# Altium PCB ZigBug.PcbDoc
Units mil, origin at the board's own origin, x right, y up, seen from the top; angles counter-clockwise.
Board outline 1800 x 2750 mil, 4 copper layers (Top Layer, GND, VCC, Bottom Layer), stack 30.634 mil thick; 66 components, 59 nets, 305 pads, 72 vias.
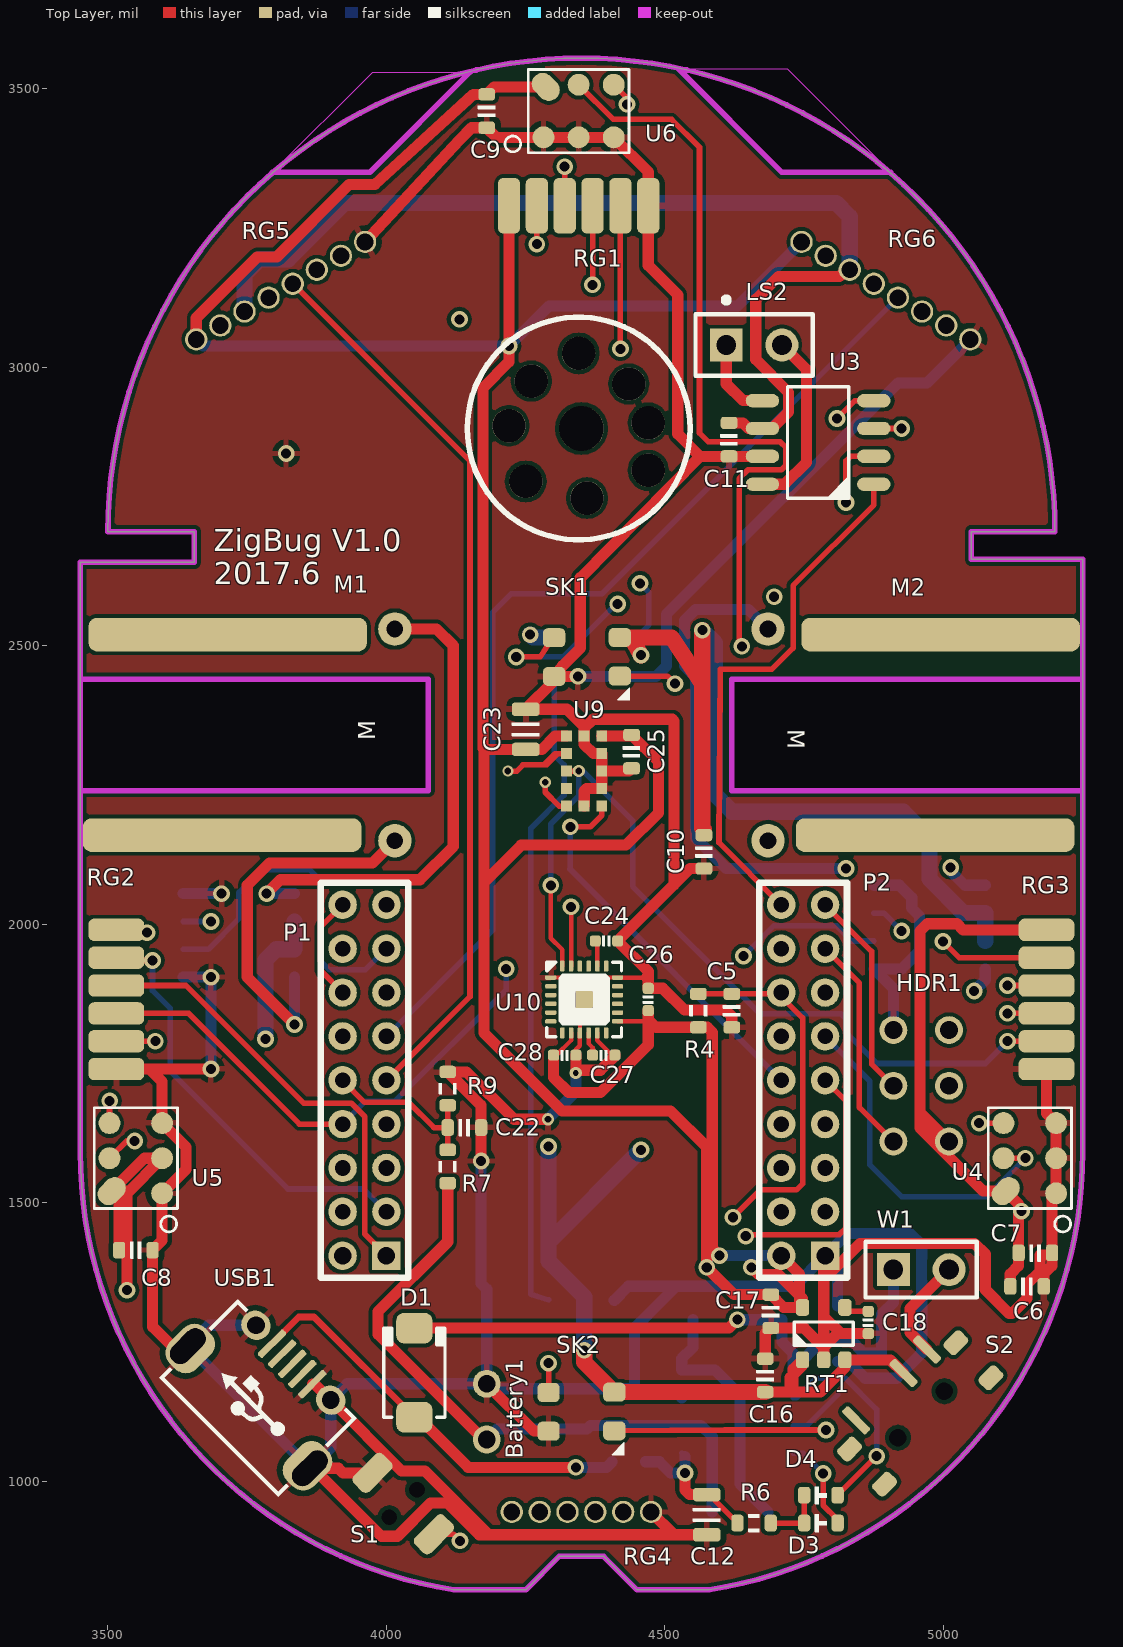
[diagram p0: Top Layer view]
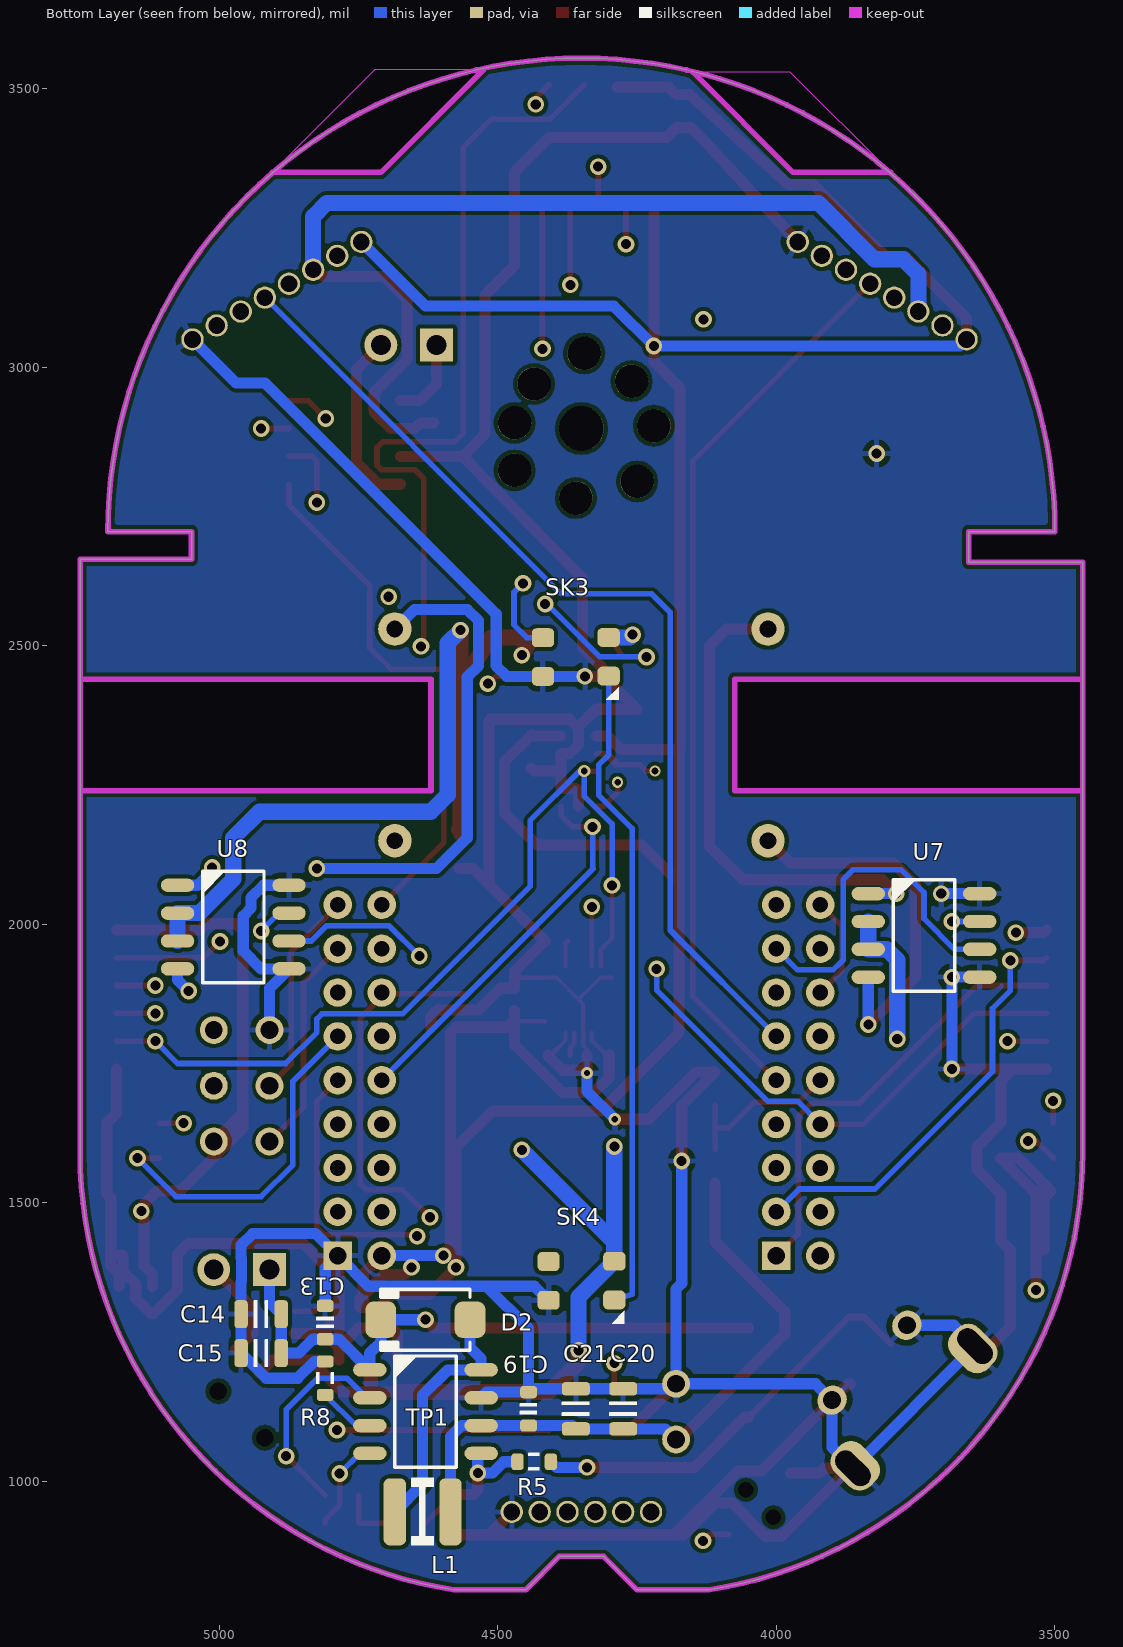
[diagram p1: Bottom Layer view, seen from below]
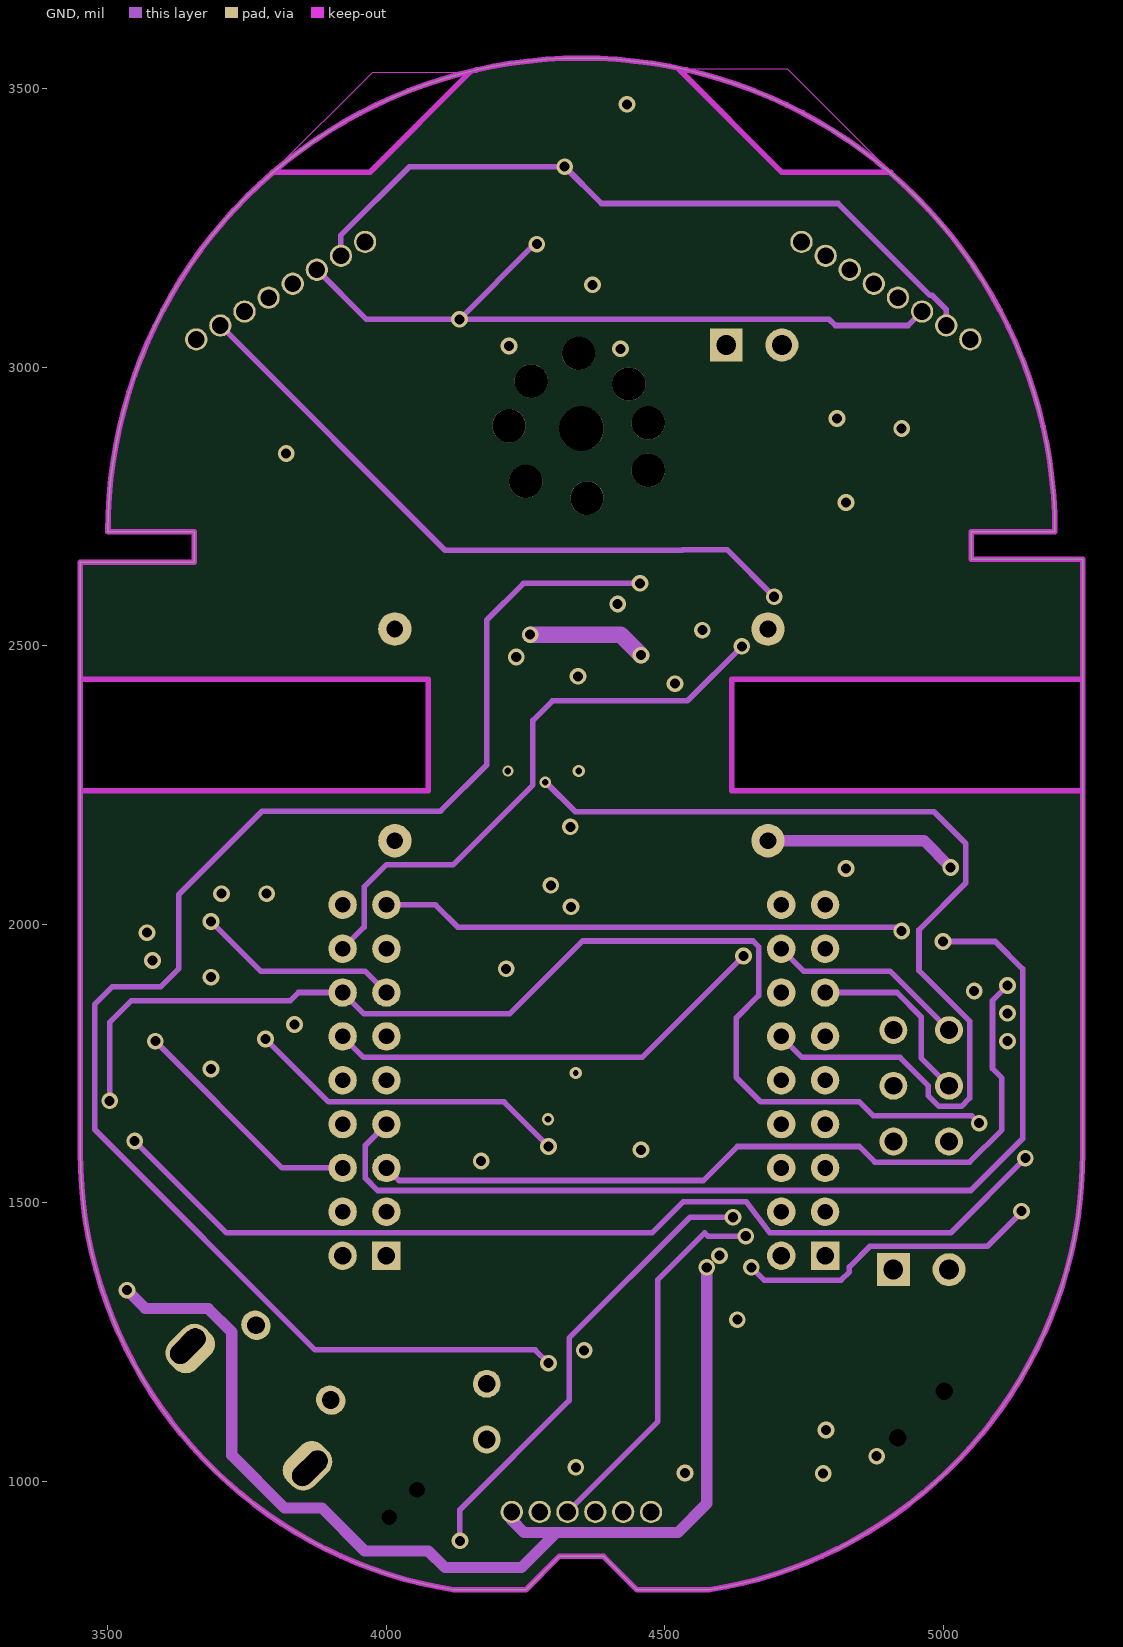
[diagram p2: GND]
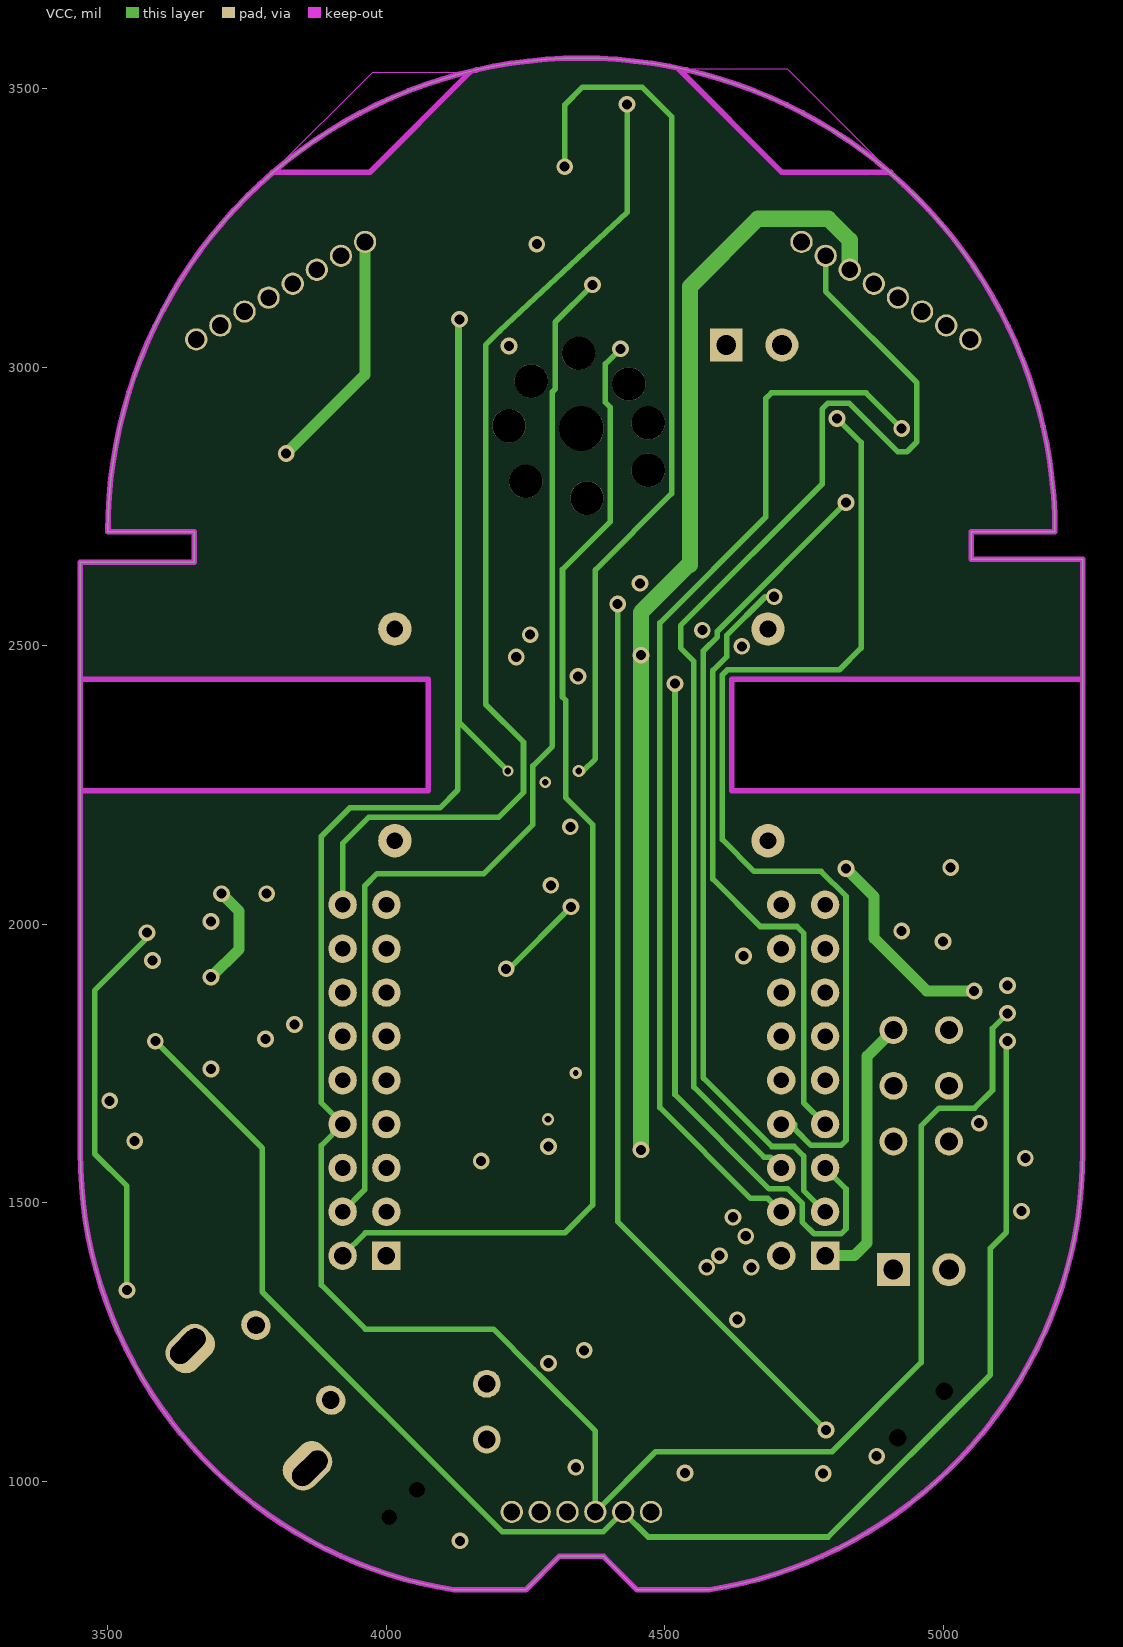
[diagram p3: VCC]
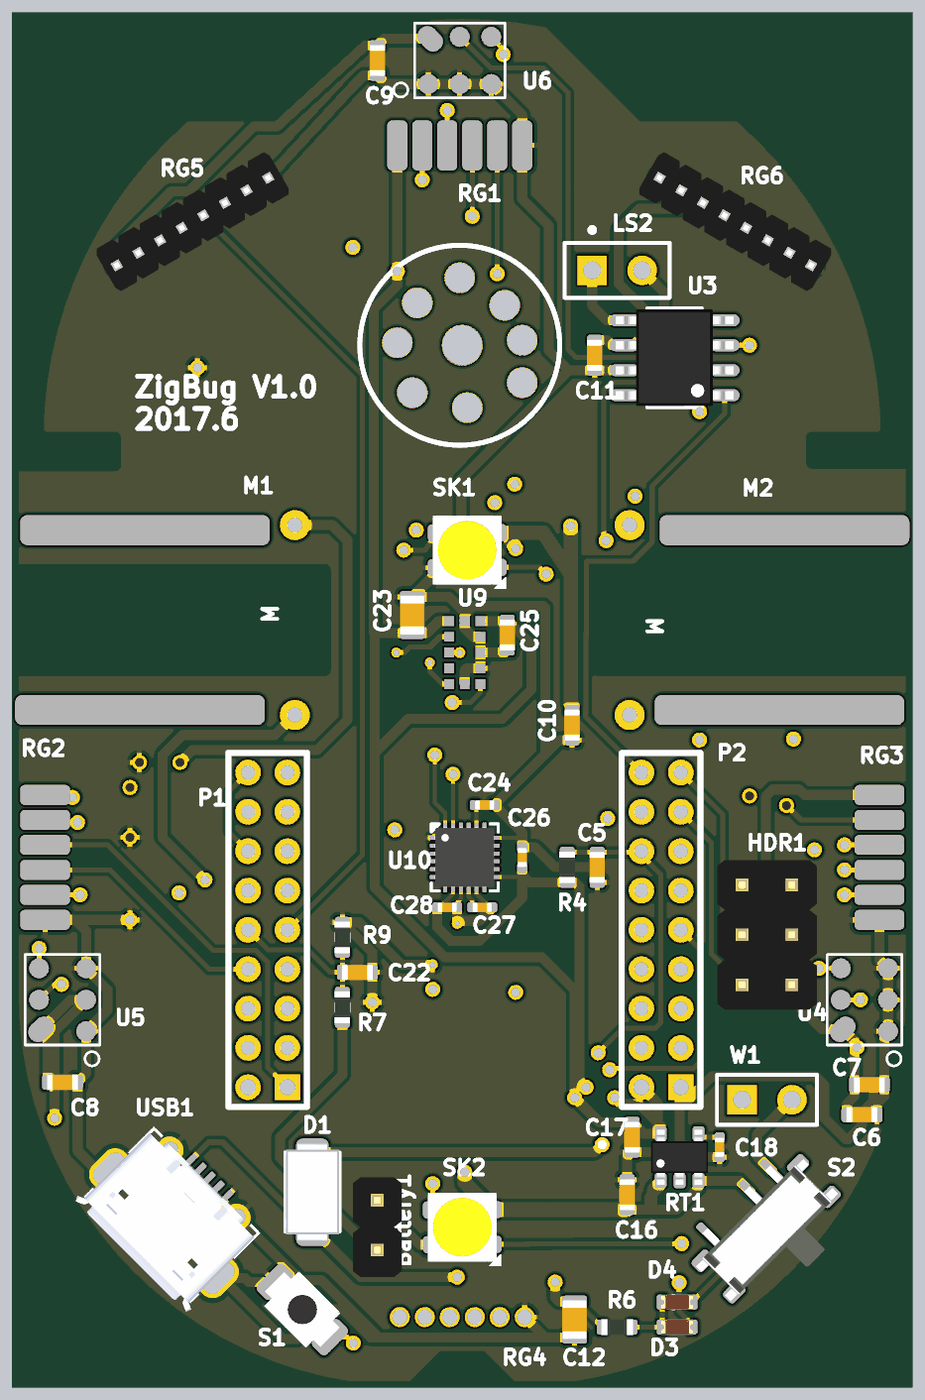
[diagram p4: 3D render of the assembled board from above, using the file's embedded part models]
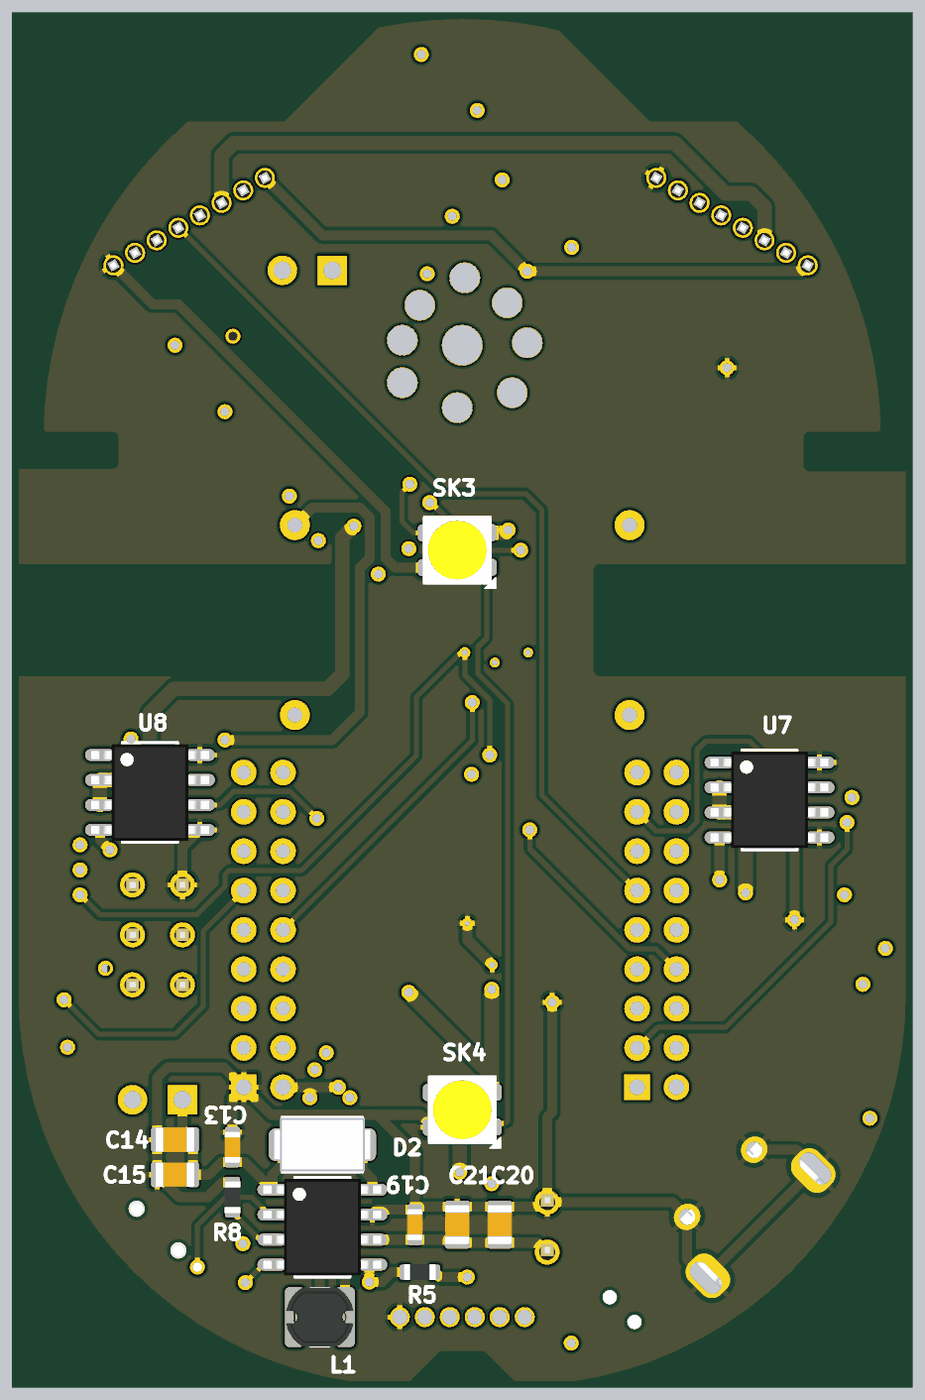
[diagram p5: 3D render of the assembled board from below, using the file's embedded part models]

## Layer stack, top to bottom
Top Solder: solder mask 0.4, Solder Resist, Dk 3.5
Top Layer: signal copper 1.4
Dielectric 1: core 10, FR-4, Dk 4.2
GND: signal copper 1.417
Dielectric 3: prepreg 5, Dk 4.2
VCC: signal copper 1.417
Dielectric 2: core 10, Dk 4.2
Bottom Layer: signal copper 1.4
Bottom Solder: solder mask 0.4, Solder Resist, Dk 3.5

## Board outline
4121,805 4250,805 4310,865 4390,865 4450,805 4579.26,805 ccw(c4454.87,1590.34) 5250,1590.34 5250,1590 5250,2655 5050,2655 5050,2705 5200,2705 ccw(c4350,2705) 3500,2705 3655,2705 3655,2650 3450,2650 3450,1590 3450.26,1590.33 ccw(c4245.38,1590.33)
cut-out: 3450,2440 4075,2440 4075,2240 3450,2240
cut-out: 5250,2440 4620,2440 4620,2240 5250,2240
cut-out: 4525,3535 4710,3350 4905,3350 4720,3535
cut-out: 4150,3530 3970,3350
cut-out: 3970,3350 3795,3350 3975,3530 4150,3530

## Design rules (kind name [scope] priority, off if disabled: settings)
Clearance Clearance_Poly [InPolygon] p1: gap=7 ignorepadtopadclearanceinfootprint=FALSE
Clearance [All] p2: gap=7 ignorepadtopadclearanceinfootprint=FALSE except(0: Arc-Hole Track-Hole SMDPad-Hole THPad-Hole Via-Hole Fill-Hole Poly-Hole Region-Hole Text-Hole)
MinimumSolderMaskSliver [All] p1: minsoldermaskwidth=1
PolygonConnect [All] p1: connectstyle=Relief reliefconductorwidth=10 reliefentries=4 polygonreliefangle="90 Angle" airgapwidth=10
RoutingVias [All] p1: holewidth=18 width=30 viastyle="Through Hole" minholewidth=12 minwidth=20 maxholewidth=28 maxwidth=50
SilkToSilkClearance [All] p1: silktosilkclearance=2
SilkToSolderMaskClearance [IsPad] p1: minsilkscreentomaskgap=2 clearancetoexposedcopper=TRUE
SolderMaskExpansion [All] p1: expansion=4
Width Width_VBUS [InNet('VBUS')] p1: maxlimit=30 minlimit=10 preferedwidth=20 midlayer1_maxwidth=10 midlayer1_prefwidth=10 midlayer2_maxwidth=10 midlayer2_prefwidth=10 minimp=50.000000 maximp=50.000000 favimp=50.000000
Width Width_VCC5 [InNet('VCC5V')] p2: maxlimit=30 minlimit=10 preferedwidth=29 toplayer_prefwidth=20 midlayer1_prefwidth=20 midlayer2_prefwidth=20 minimp=50.000000 maximp=50.000000 favimp=50.000000
Width Width_V28 [InNet('VCC2.8V')] p3: maxlimit=30 minlimit=7 preferedwidth=20 midlayer1_minwidth=10 midlayer2_minwidth=10 minimp=50.000000 maximp=50.000000 favimp=50.000000
Width Width_VBAT [InNet('VBAT')] p4: maxlimit=30 minlimit=10 preferedwidth=20 midlayer1_maxwidth=10 midlayer1_prefwidth=10 midlayer2_maxwidth=10 midlayer2_prefwidth=10 minimp=50.000000 maximp=50.000000 favimp=50.000000
Width Width_GND [InNet('GND')] p5: maxlimit=50 minlimit=7 preferedwidth=20 midlayer1_minwidth=10 midlayer2_minwidth=10 minimp=50.000000 maximp=50.000000 favimp=50.000000
Width [All] p6: maxlimit=30 minlimit=7 preferedwidth=10 midlayer1_minwidth=10 midlayer2_minwidth=10 minimp=50.000000 maximp=50.000000 favimp=50.000000
27 further rules are at their usual default settings.

## Classes and differential pairs
component class U_Sensors: C23 C24 C25 C26 C27 C28 RG1 RG2 RG3 RG4 RG5 RG6 U9 U10
component class U_Power: Battery1 C10 C11 C12 C13 C14 C15 C16 C17 C18 C19 C20 C21 C22 D1 D2 D3 D4 L1 R5 R6 R7 R8 R9 RT1 S2 TP1 USB1 W1
component class U_Motor: M1 M2 U7 U8
component class U_Micphone: C6 C7 C8 C9 U4 U5 U6
component class U_MCU: C5 HDR1 P1 P2 R4 S1
component class U_LED: SK1 SK2 SK3 SK4
component class U_Audio: LS2 U3

## Components (designator, comment, footprint, x,y, rotation, side; value= is the part's Value field where it differs from the comment)
Battery1 "Li-Po Battery" HDR1X2_2.54_180 4180,1175 r0 top
C5 "Cap_0603" CAP_0603 4620,1845 r90 top value=0.47uF
C6 "Cap_0603" CAP_0603 5150,1350 r180 top value=10uF
C7 "Cap_0603" CAP_0603 5165,1410 r180 top value=0.1uF
C8 "Cap_0603" CAP_0603 3550,1415 r180 top value=0.1uF
C9 "Cap_0603" CAP_0603 4180,3460 r90 top value=0.1uF
C10 "Cap_0603" CAP_0603 4570,2130 r90 top value=10uF
C11 "Cap_0603" CAP_0603 4615,2870 r90 top value=10uF
C12 "Cap_0805" CAP_0805 4575,940 r270 top value=10uF
C13 "Cap_0603" CAP_0603 4810,1285 r270 bottom value=0.1uF
C14 "Cap_0805" CAP_0805 4925,1300 r0 bottom value=22uF
C15 "Cap_0805" CAP_0805 4925,1230 r0 bottom value=22uF
C16 "Cap_0603" CAP_0603 4680,1190 r90 top value=1uF
C17 "Cap_0603" CAP_0603 4690,1305 r90 top value=1uF
C18 "Cap_0402" CAP_0402 4865,1285 r270 top value=22n
C19 "Cap_0603" CAP_0603 4445,1130 r270 bottom value=0.1uF
C20 "Cap_0805" CAP_0805 4275,1130 r90 bottom value=22uF
C21 "Cap_0805" CAP_0805 4360,1130 r90 bottom value=22uF
C22 "Cap_0603" CAP_0603 4140,1635 r0 top value=0.1uF
C23 "Cap_0805" CAP_0805 4250,2350 r270 top value=10uF
C24 "Cap_0402" CAP_0402 4395,1970 r180 top value=2.2nF
C25 "Cap_0603" CAP_0603 4440,2310 r90 top value=0.1uF
C26 "Cap_0402" CAP_0402 4470,1865 r270 top value=10n
C27 "Cap_0402" CAP_0402 4390,1765 r180 top value=0.1u
C28 "Cap_0402" CAP_0402 4320,1765 r180 top value=0.1u
D1 "SchottkyDiode_SOD123" DO-214AC 4050,1195 r90 top value=SS32
D2 "SchottkyDiode_SOD123" DO-214AC 4630,1290 r0 bottom value=SS32
D3 "LED_0603" LED_0603_RED 4780,925 r0 top
D4 "LED_0603" LED_0603_RED 4780,975 r0 top
HDR1 "HDR2x3_2.54" HDR2X3_2.54_180 4910,1810 r0 top
L1 "Ind_CD32" IND_CD32 4635,945 r180 bottom value=4.7uH
LS2 "Speaker" PIN2 4610,3040 r0 top
M1 "Geared DC Motor 6X16" Geared_DC_Motor_6X16 3685,2345 r0 top
M2 "Geared DC Motor 6X16" Geared_DC_Motor_6X16 5015,2335 r180 top
P1 "Header 9X2" HDR2X9_2.00_180F 4000,1405 r0 top locked
P2 "Header 9X2" HDR2X9_2.00_180F 4787.4,1405 r0 top locked
R4 "Res_0603" RES_0603 4560,1845 r270 top value=5K
R5 "Res_0603" RES_0603 4435,1035 r180 bottom value=0.3Ohm
R6 "Res_0603" RES_0603 4660,925 r180 top value=1K
R7 "Res_0603" RES_0603 4110,1565 r270 top value=800K,1%
R8 "Res_0603" RES_0603 4810,1185 r270 bottom value=5K
R9 "Res_0603" RES_0603 4110,1705 r270 top value=1M,1%
RG1 "RANGE_VL53L0X_FRONT" HDR1X6_1.27_180H_SMD 4220,3290 r90 top locked
RG2 "RANGE_VL6180X_LEFT" HDR1X6_1.27_180H_SMD 3515,1990 r0 top locked
RG3 "RANGE_VL6180X_RIGHT" HDR1X6_1.27_180H_SMD 5185,1990 r0 top locked
RG4 "RANGE_VL6180X_REAR" HDR1X6_1.27_180 4225,945 r90 top locked
RG5 "RANGE_VL6180X_LED_LEFT" HDR1X8_1.27_180 3658.49,3050 r120 top locked
RG6 "RANGE_VL6180X_LED_RIGHT" HDR1X8_1.27_180 4745.1,3225 r60 top locked
RT1 "RT9193-28" SOT23-5 4785,1265 r90 top
S1 "ButtonTACT_3x4x2_180" ButtonTACT_3x4x2_180H 4030,960 r135 top
S2 "SwitchSPDT_2.8x6.6_90" SwitchSPDT_2.8X6.6_90 4960,1120 r45 top
SK1 "LED_3535_SK6812" LED_3535_4P 4360,2480 r0 top
SK2 "LED_3535_SK6812" LED_3535_4P 4350,1125 r0 top
SK3 "LED_3535_SK6812" LED_3535_4P 4360,2480 r180 bottom
SK4 "LED_3535_SK6812" LED_3535_4P 4350,1360 r180 bottom
TP1 "TP5400" SOP_E150_8 4630,1125 r180 bottom
U3 "NS4168" SOP_E150_8 4775,2865 r180 top
U4 "MP45DT02" ST_HLGA6 5155,1580 r180 top
U5 "MP45DT02" ST_HLGA6 3550,1580 r180 top
U6 "MP45DT02" ST_HLGA6 4345,3460 r90 top
U7 "TC214B" SOP_E150_8 3735,1980 r180 bottom
U8 "TC214B" SOP_E150_8 4975,1995 r180 bottom
U9 "VL53L0X" LGA12_ST_4.4X2.4X1MM 4355,2275 r90 top
U10 "MPU6050" QFN_P0.4_24 4355,1865 r0 top
USB1 "USB Mini-B" USB_Micro-AB 3760,1140 r135 top
W1 "Jumper" HDR1X2 4910,1380 r0 top

## Footprints (in the part's own frame and the unit in brackets; to place one, negate y for a bottom-side part, rotate by r counter-clockwise, add the part's x,y. Pads: shape width x height; smd on the part's side, far side on the other; paste and mask are expansions set on the pad)
ButtonTACT_3x4x2_180H [mil]
  round 0 hole 28: 0(0,35) 0(0,-35)
  rrect50% 40x74 smd: 1(-78,0) 2(78,0)
  body extent -79,-49 79,49, height 63
CAP_0402 [mil]
  rrect50% 20x20 smd: 1(-20,0) 2(20,0)
  silkscreen extent -7,-9 7,9, body extent -20,-10 20,10, height 20
CAP_0603 [mil]
  rrect50% 22x30 smd: 1(-30,0) 2(30,0)
  silkscreen extent -10,-15 10,15, body extent -31,-16 31,16, height 31
CAP_0805 [mil]
  rrect50% 24x50 smd: 1(-36,0) 2(36,0)
  silkscreen extent -12,-24 12,24, body extent -39,-25 39,25, height 39
DO-214AC [mil] "SMA"
  rrect50% 55x65 smd: 1(-80,0) 2(80,0)
  silkscreen extent -80,-55 80,55, body extent -98,-53 98,53, height 85
Geared_DC_Motor_6X16 [mil] "Geared_DC_Motor_6X16"
  rrect50% 500x60 smd: 0(20,-185) 0(30,175)
  round 60 hole 30: 1(330,185) 2(330,-195)
HDR1X2 [mm] "Connector; Header; 2 Position"
  rect 1.5x1.5 hole 0.9: 1(0,0)
  round 1.5 hole 0.9: 2(2.54,0)
  silkscreen extent -1.27,-1.27 3.81,1.27
HDR1X2_2.54_180 [mil]
  round 50 hole 32: 1(0,0) 2(0,-100)
  body extent -49,-150 49,50, height 323
HDR1X6_1.27_180 [mil]
  round 40 hole 30: 1(0,0) 2(0,-50) 3(0,-100) 4(0,-150) 5(0,-200) 6(0,-250)
HDR1X6_1.27_180H_SMD [mil]
  rrect50% 100x40 smd: 1(0,0) 2(0,-50) 3(0,-100) 4(0,-150) 5(0,-200) 6(0,-250)
HDR1X8_1.27_180 [mil]
  round 40 hole 30: 1(0,0) 2(0,-50) 3(0,-100) 4(0,-150) 5(0,-200) 6(0,-250) 7(0,-300) 8(0,-350)
  body extent -49,-375 49,25, height 210
HDR2X3_2.54_180 [mil]
  round 50 hole 32: 1(0,0) 2(100,0) 3(0,-100) 4(100,-100) 5(0,-200) 6(100,-200)
  body extent -50,-250 150,50, height 335
HDR2X9_2.00_180F [mm]
  rect 1.3x1.3 hole 0.8: 1(0,0)
  round 1.3 hole 0.8: 2(-2,0)
  round 1.3 hole 0.711: 3(0,2) 4(-2,2) 5(0,4) 6(-2,4) 7(0,6) 8(-2,6) 9(0,8) 10(-2,8) 11(0,10) 12(-2,10) 13(0,12) 14(-2,12) 15(0,14) 16(-2,14) 17(0,16) 18(-2,16)
  silkscreen extent -3,-1 1,17
IND_CD32 [mil]
  rrect50% 40x120 smd: 1(-50,0) 2(50,0)
  silkscreen extent -20,-60 20,60, body extent -68,-59 68,59, height 83
LED_0603_RED [mil]
  rrect50% 22x30 smd: 1(-30,0) 2(30,0)
  silkscreen extent -10,-16 10,16, body extent -32,-16 32,16, height 24
LED_3535_4P [mil]
  rrect50% 40x34 smd: 1(-59,34.45) 2(-59,-35) 3(59,-34.45) 4(59,35)
  silkscreen extent 55,-77 77,-55, body extent -69,-69 69,69, height 26
LGA12_ST_4.4X2.4X1MM [mil] "VL53L0X, LGA12 4.4X2.4X1MM"
  rect 19.69x19.69 smd: 1(62.99,-31.5) 2(31.5,-31.5) 3(0,-31.5) 4(-31.5,-31.5) 5(-62.99,-31.5) 6(-62.99,0) 7(-62.99,31.5) 8(-31.5,31.5) 9(0,31.5) 10(31.5,31.5) 11(62.99,31.5) 12(62.99,0)
PIN2 [mm] "Photosensitive Diode; 2 Leads"
  rect 1.5x1.5 hole 0.9: 1(0,0)
  round 1.5 hole 0.9: 2(2.54,0)
  silkscreen extent -1.4,-1.4 3.94,2.17
QFN_P0.4_24 [mil]
  rrect20% 32x32 smd: 0(0,0)
  rrect50% 20x8 smd: 1(-60,39.37) 2(-60,23.62) 3(-60,7.87) 4(-60,-7.87) 5(-60,-23.62) 6(-60,-39.37) 13(60,-39.37) 14(60,-23.62) 15(60,-7.87) 16(60,7.87) 17(60,23.62) 18(60,39.37)
  rrect50% 8x20 smd: 7(-39.37,-60) 8(-23.62,-60) 9(-7.87,-60) 10(7.87,-60) 11(23.62,-60) 12(39.37,-60) 19(39.37,60) 20(23.62,60) 21(7.87,60) 22(-7.87,60) 23(-23.62,60) 24(-39.37,60)
  silkscreen extent -67,-67 67,67, body extent -60,-60 60,60, height 39
RES_0603 [mil]
  rrect50% 22x30 smd: 1(-30,0) 2(30,0)
  silkscreen extent -10,-16 10,16, body extent -31,-16 31,16, height 18
SOP_E150_8 [mil]
  oval 60x24 smd: 1(-100,75) 2(-100,25) 3(-100,-25) 4(-100,-75) 5(100,-75) 6(100,-25) 7(100,25) 8(100,75)
  silkscreen extent -55,-100 55,100, body extent -118,-96 118,96, height 69
SOT23-5 [mil]
  rrect50% 30x24 smd: 1(-47,38) 2(-47,0) 3(-47,-38) 4(47,-38) 5(47,38)
  silkscreen extent -21,-53 21,53, body extent -55,-57 55,57, height 57
ST_HLGA6 [mm]
  round 1 smd paste-25.4: 1(-1.2,1.6) 2(-1.2,0) 3(-1.2,-1.6) 4(1.2,-1.6) 5(1.2,0)
  oval 1x1.4 smd rot 135 paste-25.4: 6(1.1,1.5)
  silkscreen extent -1.9,-2.3 1.9,3.36
SwitchSPDT_2.8X6.6_90 [mil]
  rrect50% 42x30 smd: 0(-135,47) 0(-135,-42) 0(135,-42) 0(135,47)
  round 10 hole 31.5: 0(-59.05,0) 0(59.05,0)
  rrect50% 16x60 smd: 1(90,75) 2(30,75) 3(-90,75)
  body extent -152,-111 151,86, height 55
USB_Micro-AB [mil]
  rrect80% 68x90 hole 37 slot 75 at 90 deg copper offset 6,0 mask+0: 0(-155,10)
  oval 54x50 hole 32 mask+0: 0(-95,-103) 0(95,-103)
  rrect80% 68x90 hole 37 slot 75 at 90 deg copper offset -6,0 mask+0: 0(155,10)
  rrect50% 12x64 smd: 1(51.18,-100) 2(25.59,-100) 3(0,-100) 4(-25.59,-100) 5(-51.18,-100)
  silkscreen extent -151,-113 151,86, body extent -161,-109 161,104, height 108

## Part data
Battery1: library part Battery_LiPo, "Li-Po Rechargable Battery"
C5 C6 C7 C8 C9 C10 C11 C12 C13 C14 C15 C16 C17 C18 C19 C20 C21 C22 C23 C24 C25 C26 C27 C28: "Capacitor"
D1 D2: "Diode"
D3: "LED", Color=Green
D4: "LED", Color=Red
HDR1: "Header"
L1: "Inductor"
LS2: "Loudspeaker", LatestRevisionDate=17-Jul-2002, LatestRevisionNote="Re-released for DXP Platform.", PackageReference=PIN2, Published=24-Mar-1999, Publisher="Altium Limited"
M1 M2: library part GearMotor_DC_6X16, "Geared DC Motor, 6mm D, L=16mm"
P1 P2: "Header, 9-Pin, Dual row", LatestRevisionDate=17-Jul-2002, LatestRevisionNote="Re-released for DXP Platform.", Publisher="Altium Limited"
R4 R5 R6 R7 R8 R9: "Resistor"
RG1: library part RANGE_VL53L0X
RG2 RG3 RG4: library part RANGE_VL6180X
RG5 RG6: library part RANGE_VL6180X_LED
RT1: library part RT9193, "Power"
S1: "Button"
S2: "Switch"
SK1 SK2 SK3 SK4: "LED"
TP1: "Charge"
U3: "D Class Audio Amp with I2S input"
U4 U5 U6: "Mic Omni-Directional -26dB 3.6V Rectangular Solder Pad", Package=None, Availability=Good, MF=STMicroelectronics, MP=MP45DT02, Price="2.57 USD", Value=*
U7 U8: "DC Motor Driver 1 Channel  (Cheap Replacement of L9110)"
U9: "VL53L0X - Laser Time of Flight Sensor (2M range)", VDD="VDD:  / Op. Temp:"
U10: "Sensor Motion"
USB1: library part USB_Micro, "USB"
W1: "Jumper Wire", LatestRevisionDate=17-Jul-2002, LatestRevisionNote="Re-released for DXP Platform.", PackageDescription="Radial Cap, Thru-Hole; 2 Leads; 0.2 in Pin Spacing", PackageReference=RAD-0.2, Published=24-Mar-1999, Publisher="Altium Limited"

## Free pads (board coordinates)
  round 60 hole 60: 5(4220,2895) 5(4250,2795) 5(4260,2975) 5(4345,3025) 5(4360,2765) 5(4435,2970) 5(4470,2815) 5(4470,2900)
  round 80 hole 80: 5(4350,2890)

## Via types
v1: diameter 30, hole 18, Top Layer to Bottom Layer, 67 vias
v2: diameter 22, hole 12, Top Layer to Bottom Layer, 2 vias
v3: diameter 20, hole 12, Top Layer to Bottom Layer, 2 vias
v4: diameter 22, hole 10, Top Layer to Bottom Layer, 1 vias

## Nets (pads, with @x,y where several pads share a name; then routed paths per layer and width w, separated by ;. In a path a pad name is that pad's centre, name@x,y a point inside that pad or via, vN(x,y) a via of type N, cw(c..) or ccw(c..) an arc to the next point about the centre after c; other vN are vias at no path point)
Debug_RX: HDR1.3 P2.17 | length 375.7
  Top Layer w10: P2.17 4871,1951.32 4871,1749 HDR1.3
Debug_TX: HDR1.5 P2.15 | length 397
  Top Layer w10: P2.15 4849,1894.58 4849,1671 HDR1.5
GND: Battery1.1 C5.1 C6.1 C7.1 C8.1 C9.1 C10.1 C11.1 C12.2 C13.1 C14.2 C15.2 C16.2 C17.1 C18.2 C19.1 C20.2 C21.2 C22.2 C23.1 C24.1 C25.1 C26.1 C27.1 C28.1 HDR1.1 P2.1 R8.1 R9.1 RG1.6 RG2.6 RG3.6 RG4.6 RG5.8 RG6.8 RT1.2 S1.2 SK1.2 SK2.2 SK3.2 SK4.2 TP1.7 U3.7 U4.1 U4.2 U4.3 U5.1 U5.3 U6.1 U6.2 U6.3 U7.5 U7.8 U8.5 U8.8 U9.2 U9.3 U9.4 U9.6 U9.12 U10.0 U10.1 U10.9 U10.11 U10.18 USB1.0 USB1.5 | length 13883.2
  Top Layer w7: U10.1 4315.63,1904.37 U10.0 ; U10.9 4347.13,1857.13 U10.0 ; U10.18 4394.37,1904.37 U10.0
  Top Layer w8: C28.1 4340,1775 4347.13,1782.13 U10.9 ; U10.11 4378.62,1791.38 C27.1@4405,1765 ; U10.18 4466.63,1904.37
  Top Layer w20: RG2.6 3575,1740 ; USB1.0@3643.33,1242.53 3615,1242.53 3580,1277.53 C8.1 3597.24,1432.24 U5.1 3640,1559.76 3640,1600.24 U5.3 3597.24,1717.76 3575,1740 ; v1(3685,1740) 3575,1740 ; USB1.0@3862.53,1023.33 USB1.0@3869.09,1023.33 ; USB1.5 3871.14,1174.52 3900.01,1145.66 4026.92,1018.75 4068.83,1018.75 4183.58,904 ; RG5.8 4131,3408 4153,3430 C9.1 4197.24,3412.76 U6.1 U6.2 U6.3 4470,3350.75 RG1.6 4470,3183 4523,3130 4523,2880 4563,2840 ; S1.2 3922.17,1015.15 3914,1023.33 USB1.0@3869.09,1023.33 ; v1(4170,1575) C22.2 4170,1675 R9.1 4144,1735 4229,1650 v2(4290,1650) ; Battery1.1 4265,1090 SK2.2 ; C28.1 v4(4340,1733) 4345,1738 4384.11,1738 4410,1763.89 C27.1 ; v1(4343.84,2445) SK1.2 ; U9.6 4355,2239 4359.5,2243.5 U9.4 U9.3 ; C25.1 4435,2275 U9.3 ; 4466.63,1904.37 4470,1901 C26.1 ; RG4.6 4516,904 ; C10.1 4545,2100 4516,2071 ; C12.2 4516,904 ; C5.1 4620,1834 4608,1846 4535,1846 4496,1885 C26.1 ; U3.7 C11.1 4563,2840 ; C16.2 4680,1265 C17.1 4750,1275 4785,1240 ; RT1.2 4785,1240 ; 4785,1296 4816,1265 C18.2 4810,1265 4785,1240 ; 4785,1362.15 4849.85,1427 5056,1427 5075,1408 5075,1344 5118,1301 5123,1301 5150,1328 5150,1354 5173,1377 5173,1406 C7.1@5195,1406 ; P2.1 4785,1402.6 4785,1240 ; C6.1 5180,1372 5195,1387 C7.1@5195,1406 ; RG3.6 5185,1660.24 U4.3 U4.2 U4.1 5195,1509.76 C7.1 C7.1@5195,1406 ; USB1.0@3869.09,1023.33 3991.17,901.25 4019.33,901.25 4079.09,961.01 4109.6,961.01 4166.61,904 4183.58,904 ; 4183.58,904 4516,904 ; SK1.2 4316,2464 4348,2496 4348,2622 4563,2840 ; SK1.2 4301,2437 C23.1 4324,2386 4355,2355 U9.12 ; U9.12 4355,2352 4371,2368 4512.99,2368 4516,2364.99 4516,2071 ; U9.12 4355,2323 4371.5,2306.5 U9.2 U9.3 ; C26.1 4470,1915 C24.1 4516,2071
  VCC w20: v1(3685,1905) 3735,1955 3735,2024 v1(3704,2055) ; v1(3820,2845) 3961.6,2986.6 RG5.8 ; P2.1 4840,1405 4863,1428 4863,1763 HDR1.1
  Bottom Layer w20: U7.5 v1(3685,1905) v1(3685,1740) ; U7.8 v1(3704,2055) ; USB1.0@3765.66,1280.01 3680.8,1280.01 3643.33,1242.53 3862.53,1023.33 3900.01,1060.8 3900.01,1145.66 3929.35,1175 Battery1.1 ; v1(4170,1575) 4170,1355 4180,1345 Battery1.1 ; v2(4290,1650) 4340,1700 v4(4340,1733) ; v1(4343.84,2445) SK3.2 4484,2445 4503,2464 4503,2556.75 4918.25,2972 4970.2,2972 RG6.8 ; SK4.2 4434,1350 4520,1350 ; TP1.7 4520,1160 C19.1 ; R8.1 4829.35,1215 4859.35,1185 4916,1185 C15.2 C14.2 4961,1358.96 4960.47,1359.49 4960.47,1400.52 4961,1401.04 4961,1424 4940,1445 4827.4,1445 P2.1 ; C13.1 4810,1382.4 P2.1 ; U8.8 4921,2070 4943,2048 4943,2029 4957,2015 4957,1952 4925,1920 U8.5 4910,1885 HDR1.1 ; Battery1.1 4189,1166 C20.2 C21.2 4439,1166 C19.1 ; C19.1 4445,1275 4520,1350 ; 4520,1350 4732.4,1350 P2.1
I2S_BCK: P2.3 U3.2 | length 1621.5
  Top Layer w10: v1(4825,2757.04) 4825,2832 4833,2840 U3.2
  VCC w10: P2.3 4749,1522.14 4749,1584 4732,1601 4692,1601 4569,1724 4569,2491 4594,2516 4594,2526.04 v1(4825,2757.04)
I2S_DATA: P2.8 U3.4 | length 1917.5
  Top Layer w10: v1(4809,2908) 4841,2940 U3.4
  VCC w10: P2.8 4733,1641.22 4733,1632.52 4762.52,1603 4816,1603 4825,1612 4825,2050 4824.99,2050.49 4780.49,2095 4660,2095 4603,2152 4603,2448 4612,2457 4813,2457 4852,2496 4852,2865 v1(4809,2908)
I2S_WS: P2.4 U3.3 | length 1971.8
  Top Layer w10: U3.3 v1(4925,2890)
  VCC w10: P2.4 4684.51,1507.89 4653.79,1507.89 4491,1670.68 4491,2541 4681,2731 4681,2944 4691,2954 4861,2954 v1(4925,2890)
INTM: U10.12
LED_DATA: P2.5 SK1.3 | length 1401.6
  Top Layer w10: SK1.3 4504.45,2445.55 v1(4518,2432)
  VCC w10: v1(4518,2432) 4518,1694 4687.11,1524.89 4720.68,1524.89 4746.25,1499.31 4746.25,1465.75 4768,1444 4816,1444 4825,1453 4825,1524.88 P2.5
MCU_RESET: C5.2 P2.14 R4.1 S1.1 | length 1623.1
  Top Layer w10: S1.1 4120,904.85 v1(4131.85,893) ; R4.1 C5.2 ; v1(4622,1474) 4671,1523 4736,1523 4747,1534 4747,1832 4704,1875 C5.2 ; P2.14 4706.22,1875 C5.2
  GND w10: v1(4131.85,893) 4131.85,948.85 4328,1145 4328,1257 4545,1474 v1(4622,1474)
NetC12_1: C12.1 R5.1 R6.2 TP1.5 | length 266.2
  Top Layer w10: C12.1 4579,976 R6.2
  Top Layer w20: v1(4536,1015) 4536,984 4544,976 C12.1
  Bottom Layer w10: TP1.5 TP1.5@4536,1044
  Bottom Layer w20: R5.1 4490,1035 4510,1015 v1(4536,1015) TP1.5@4536,1044
NetC13_2: C13.2 C14.1 C15.1 D1.2 D2.2 TP1.1 W1.1 | length 1115.3
  Top Layer w20: D1.2 4615,1275 v1(4630,1290)
  Bottom Layer w10: C13.2 4825,1255
  Bottom Layer w20: v1(4630,1290) D2.2 4710,1250 4730,1230 TP1.1 4785,1255 C13.2 ; 4825,1255 4831.77,1255 4856.77,1230 C15.1 C14.1 4910,1321 W1.1
NetC18_1: C18.1 RT1.4 | length 44.9
  Top Layer w10: RT1.4 4830,1305 C18.1
NetC22_1: C22.1 P1.10 R7.1 R9.2 | length 303.9
  Top Layer w10: P1.10 3960.91,1680.31 4040,1680.31 4085.31,1635 C22.1 ; R7.1 C22.1 ; R9.2 C22.1
NetC24_2: C24.2 U10.20 | length 46.5
  Top Layer w8: U10.20 C24.2@4378.62,1966.38
  Top Layer w10: C24.2 C24.2@4378.62,1966.38
NetD2_1: D2.1 L1.1 TP1.8 | length 452.6
  Bottom Layer w20: D2.1 4550,1240 4530,1220 TP1.8 4590,1200 4635,1155 4635,995 L1.1
NetD3_1: D3.1 D4.1 R6.1 | length 110
  Top Layer w10: R6.1 D3.1 D4.1
NetD3_2: D3.2 TP1.4 | length 168.7
  Top Layer w10: v1(4784,1014) 4784,957.01 4810,931.01 D3.2
  Bottom Layer w10: TP1.4 4748,1050 v1(4784,1014)
NetD4_2: D4.2 TP1.2 | length 370.7
  Top Layer w10: D4.2 v1(4880,1045)
  Bottom Layer w10: TP1.2 4736.18,1150 4771.18,1185 4823.99,1185 4880,1128.99 v1(4880,1045)
NetLS2_1: LS2.1 U3.5 | length 147.4
  Top Layer w20: LS2.1 4610,2970 4640,2940 U3.5
NetLS2_2: LS2.2 U3.8 | length 324.4
  Top Layer w20: U3.8 4715,2790 4754,2829 4754,2996 LS2.2
NetM1_1: M1.1 U7.1 | length 897.6
  Top Layer w20: v1(3785,2055) 3810,2080 4060,2080 4120,2140 4120,2500 4090,2530 M1.1
  Bottom Layer w20: v1(3785,2055) U7.1
NetM1_2: M1.2 U7.4 | length 668.3
  Top Layer w20: v1(3835,1820) 3750,1905 3750,2070 3790,2110 3975,2110 M1.2
  Bottom Layer w20: v1(3835,1820) U7.4
NetM2_1: M2.1 U8.1 | length 426.7
  GND w20: M2.1 4965,2150 v1(5013,2102)
  Bottom Layer w10: v1@5013,2096 v1(5013,2102)
  Bottom Layer w20: v1@5013,2096 5039,2070 U8.1
NetM2_2: M2.2 U8.4 | length 1277.2
  VCC w20: v1(4825,2100) 4875,2050 4875,1975 4970,1880 v1(5055,1880)
  Bottom Layer w20: M2.2 4650,2565 4555,2565 4535,2545 4535,2464 4555,2444 4555,2155 4610,2100 v1(4825,2100) ; v1(5055,1880) 5075,1900 U8.4
NetP1_1: P1.1 RG2.3 | length 809.3
  Top Layer w10: RG2.3 3640,1890 3851.19,1678.81 3936.83,1678.81 3961,1654.64 3961,1444 P1.1
NetP1_2: P1.2 RG1.5 | length 2353.3
  Top Layer w10: v1(4420,3033) RG1.5
  VCC w10: P1.2 3962.26,1446 4320,1446 4370,1496 4370,2179 4322,2227 4322,2402 4316,2408 4316,2637 4402,2723 4402,2928 4393,2937 4393,3006 v1(4420,3033)
NetP1_3: P1.3 RG2.2 | length 771.8
  Top Layer w10: RG2.2 3520,1935 v1(3580,1935)
  Bottom Layer w10: v1(3580,1935) 3580,1881 3612,1849 3612,1736 3823.26,1524.74 3959,1524.74 P1.3
NetP1_4: P1.4 RG1.4 | length 2104.6
  Top Layer w10: v1(4370,3148) RG1.4
  VCC w10: P1.4 3961,1523.48 3961,2069 3983,2091 4175,2091 4263,2179 4263,2284.35 4298,2319.35 4298,2956 4303,2961 4303,3081 v1(4370,3148)
NetP1_5: P1.5 RG3.3 | length 1522.5
  Top Layer w10: v1(5115,1890) RG3.3
  GND w10: P1.5 4022.56,1539.92 4568.92,1539.92 4630,1601 4849,1601 4877,1573 5047,1573 5105,1631 5105,1724 5088,1741 5088,1863 v1(5115,1890)
NetP1_7: P1.7 RG3.2 | length 2006.9
  Top Layer w10: v1(4999,1969) 5028,1940 RG3.2
  GND w10: P1.7 3962,1603.22 3962,1544 3984,1522 5049,1522 5142,1615 5142,1920 5093,1969 v1(4999,1969)
NetP1_9: P1.9 RG5.5 | length 1624
  Top Layer w10: RG5.5 4150,2831.7 4150,1869.96 P1.9
NetP1_11: P1.11 RG6.5 | length 1802
  Bottom Layer w10: P1.11 4190.57,1989.27 4190.57,2560 4223.71,2593.14 4386.44,2593.14 RG6.5
NetP1_12: P1.12 U8.6 | length 1078.3
  GND w10: P1.12 3958.96,1761 4459,1761 v1(4641,1943)
  Bottom Layer w10: v1(4641,1943) 4695,1997 4808.1,1997 4835.1,1970 U8.6
NetP1_13: P1.13 U7.7 | length 417.8
  GND w10: v1(3685,2005) 3774,1916 3961.44,1916 P1.13
  Bottom Layer w10: U7.7 v1(3685,2005)
NetP1_14: P1.14 P1.18 U4.4 U5.4 U6.4 | length 4288.7
  Top Layer w10: U5.4 3502.76,1682.76 v1(3503,1683) ; P1.14 3883,1915.7 3883,1996.66 P1.18 ; U6.4 4432,3483.24 v1(4432,3472) ; v1(5064,1642.99) U4.4
  GND w10: v1(3503,1683) 3503,1824 3542,1863 3827.56,1863 3842,1877.44 P1.14 3959.7,1839 4221,1839 4352,1970 4658,1970 4668,1960 4668,1872 4628,1832 4628,1725 4672,1681 4849,1681 4874,1656 5050.99,1656 v1(5064,1642.99)
  VCC w10: P1.18 3921.26,2145.26 3968,2192 4201.23,2192 4246,2236.77 4246,2327 4178,2395 4178,3040 4203,3065 4432,3278 v1(4432,3472)
NetP1_15: P1.15 U7.6 | length 626.5
  Bottom Layer w10: U7.6 3680,1955 3735,2010 3735,2057 3776,2098 3862,2098 3880,2080 3880,1936 3898,1918 3961.82,1918 P1.15
NetP1_16: P1.16 U6.5 | length 2423
  Top Layer w10: U6.5 4407.24,3445 4512,3445 4562,3395 4562,2882 4578,2866 4707,2866 4717,2856 4717,2824 4709,2816 4649,2816 4633,2800 4633,2504 v1(4638,2499)
  GND w10: P1.16 3960,1994.92 3960,2067 4000,2107 4120,2107 4263,2250 4263,2366 4298,2401 4540,2401 v1(4638,2499)
NetP1_17: P1.17 U8.7 | length 1007.7
  GND w10: P1.17 4088,2034.92 4127.92,1995 4918,1995 v1(4925,1988)
  Bottom Layer w10: U8.7 4893,2020 v1(4925,1988)
NetP2_6: P2.6 RG6.2 | length 2168.6
  VCC w10: P2.6 4689.14,1582 4677.75,1582 4552,1707.75 4552,2472 4528,2496 4528,2536 4782,2790 4782,2925 4792,2935 4831,2935 4918,2848 4934,2848 4952,2866 4952,2972.4 4788.4,3136 RG6.2
NetP2_7: P2.7 RG5.2 | length 2320.3
  GND w10: RG5.2 4105.52,2671.28 4530.8,2671.28 4531.52,2672 4612,2672 v1(4696,2588)
  VCC w10: v1(4696,2588) 4680,2588 4611,2519 4611,2480.61 4586,2455.61 4586,2081 4671,1996 4737,1996 4749,1984 4749,1679.62 P2.7
NetP2_9: P2.9 RG4.3 | length 1146
  Top Layer w10: v1(4645,1440) 4647.59,1442.59 4812.59,1442.59 4825,1455 4825,1682.36 P2.9
  GND w10: RG4.3 4487.33,1107.33 4487.33,1362.04 4571.3,1446 4577.3,1440 v1(4645,1440)
NetP2_10: P2.10 U9.5 | length 694.2
  Top Layer w10: v1(4330,2175) 4366,2175 4386.5,2195.5 U9.5
  Bottom Layer w10: v1(4330,2175) 4330,2100.62 4329,2099.62 P2.10
NetP2_11: P2.11 U4.5 U5.5 | length 2466
  Top Layer w10: U5.5 3533.76,1611 v1(3548,1611) ; U4.5 v1(5147,1580)
  GND w10: v1(3548,1611) 3713,1446 4477,1446 4532.44,1501.44 4646,1501.44 4688,1446 5013,1446 v1(5147,1580)
  Bottom Layer w10: P2.11 4868,1718.1 4868,1568 4925,1511 5078,1511 v1(5147,1580)
NetP2_12: P2.12 U9.7 | length 1804.1
  Top Layer w10: v3(4285,2255) 4285,2237 4309.99,2212.01 U9.7
  GND w10: v3(4285,2255) 4286,2255 4339,2202 4983,2202 5040,2145 5040,2074 4956,1990 4956,1917 5047,1826 5047,1688 5032,1673 4992,1673 4973,1692 4973,1710 4922,1761 4746.36,1761 P2.12
NetP2_18: P2.18 U3.1 | length 970.1
  Top Layer w10: P2.18 4597,2146.58 4599,2458 4692,2458 4730,2496 4730,2608 4875,2753 U3.1
NetR8_2: R8.2 TP1.3 | length 102.8
  Bottom Layer w10: TP1.3 4755,1100 R8.2
NetS2_1: S2.1 W1.2 | length 185
  Top Layer w20: S2.1 4940,1267.28 4940,1310 W1.2
NetSK1_1: SK1.1 SK2.3 | length 2326.1
  Top Layer w10: v1(4233,2480) 4276,2480 4298,2514.45 SK1.1 ; SK2.3 4607.45,1092 v1(4789,1092)
  VCC w10: v1(4415,2575) 4415,1466 v1(4789,1092)
  Bottom Layer w10: v1(4233,2480) 4317,2480 4412,2575 v1(4415,2575)
NetSK2_1: SK2.1 SK3.1 | length 2930.6
  Top Layer w10: SK2.1 v1(4291,1212)
  GND w10: v1(4291,1212) 4267,1236 3872,1236 3476,1632 3476,1856 3508,1888 3595,1888 3627,1920 3627,2053 3777,2203 4097,2203 4180,2286 4180,2546 4246,2612 v1(4455,2612)
  Bottom Layer w10: SK3.1 4448,2514.45 4471,2537.45 4471,2596 v1(4455,2612)
NetSK3_3: SK3.3 SK4.3 | length 1175.5
  Bottom Layer w10: SK4.3 4259,1336 4259,2172 4319,2232 4319,2286 4301,2304 SK3.3
REG: C27.2 U10.10 | length 43
  Top Layer w8: U10.10 4362.87,1785.91 4370,1778.79 4370,1775
  Top Layer w10: C27.2 4370,1775
SCL: P1.8 RG1.2 RG2.4 RG3.4 RG4.4 RG5.6 RG6.6 U9.10 U10.23 | length 7791.8
  Top Layer w8: U10.23 v1@4331.38,2021.38
  Top Layer w10: RG2.4 3645,1840 3843.78,1641.22 P1.8 ; v3@4217.57,2275 v3(4218,2275) 4234,2275 4245,2286 ; 4244.57,2286 4245,2286 ; v1(4270,3221) RG1.2 ; U9.10 4307.91,2306.5 ; v1@4331.38,2021.38 v1(4331.38,2031.38) ; v1(5115,1840) RG3.4 ; 4245,2286 4282.11,2286 ; 4282.11,2286 4287.41,2286 4307.91,2306.5 ; 4282.11,2286 4302.61,2306.5 4307.91,2306.5
  GND w10: RG5.6 3964,3086 v1(4131,3086) ; v1(4270,3221) 4266,3221 v1(4131,3086) ; RG6.6 4936.6,3075 4806,3075 4795,3086 v1(4131,3086)
  VCC w10: v1(4131,3086) v1@4131,3082 ; v1(4215,1920) 4220,1920 v1(4331.38,2031.38) ; v3(4218,2275) 4131,2362 v1@4131,3082 ; v1(5115,1840) 5088,1813 5088,1702 5056,1670 4992,1670 4960,1638 4960,1213 4800,1053 4483,1053 RG4.4 4375,1090 4280,1185 4279.82,1185 4264,1200.82 4264,1201 4192,1273 3962,1273 3883,1352 3883,1602.96 P1.8 3883,1679.48 3883,2158 3934,2209 4096,2209 4128,2241 4128,3079 v1@4131,3082
  Bottom Layer w10: P1.8 3962.41,1682.37 4015.57,1682.37 4215,1881.8 v1(4215,1920)
SDA: P1.6 RG1.3 RG2.5 RG3.5 RG4.5 RG5.7 RG6.7 U9.9 U10.24 | length 7806.2
  Top Layer w8: v1(4295,2070) 4295,1975 4315.38,1954.62 U10.24@4315.38,1925
  Top Layer w10: RG2.5 v1(3585,1790) ; RG1.3 v1(4320,3360) ; U9.9 v2(4345,2275) ; v1(5115,1790) RG3.5
  GND w10: v1(3585,1790) 3812.52,1562.48 P1.6 ; RG5.7 3918.3,3237.3 4041,3360 v1(4320,3360) 4386,3294 4811,3294 4976,3129 4979.9,3129 5004.9,3104 RG6.7
  VCC w10: v1(3585,1790) 3777,1598 3777,1340 4208,909 4389,909 RG4.5 4470,900 4793,900 5084,1191 5084,1418 5113,1447 5113,1788 v1(5115,1790) ; v1(4320,3360) 4320,3471 4352,3503 4459,3503 4512,3450 4512,2773 4375,2636 4375,2297 4353,2275 v2(4345,2275)
  Bottom Layer w10: v1(4295,2070) 4295,2180 4345,2230 v2(4345,2275) 4353,2275 4442,2186 4442,2068 4671,1839 4816,1839 4825,1830 4825,1806 4881,1750 5075,1750 v1(5115,1790)
SWCLK: HDR1.4 P2.13 | length 335.3
  GND w10: P2.13 4916.56,1877.44 4960,1834 4960,1760 HDR1.4
SWDIO: HDR1.2 P2.16 | length 361.9
  GND w10: P2.16 4748.84,1916 4904,1916 HDR1.2
VBAT: Battery1.2 C19.2 C20.1 C21.1 L1.2 R7.2 TP1.6 | length 1154.7
  Top Layer w20: R7.2 4110,1430 3985,1305 3985,1264.01 4174.01,1075 Battery1.2
  Bottom Layer w20: Battery1.2 4199,1094 C20.1 C21.1 4366,1100 C19.2 TP1.6 4565,1100 4585,1080 L1.2
VBUS: D1.1 R5.2 USB1.1 | length 746.4
  Top Layer w12: USB1.1 3842.62,1295 3870,1295 D1.1
  Top Layer w20: D1.1 4056.88,1115 4146.88,1025 v1(4340,1025)
  Bottom Layer w20: v1(4340,1025) 4395,1025 R5.2
VCC2.8V: C6.2 C7.2 C8.2 C9.2 C17.2 C23.2 C25.2 C26.2 C28.2 HDR1.6 P2.2 R4.2 RG1.1 RG2.1 RG3.1 RG4.1 RG5.1 RG6.1 RT1.5 U4.6 U5.2 U5.6 U6.6 U9.1 U9.11 U10.8 U10.13 | length 11449.2
  Top Layer w8: C28.2 4305,1765 4331.38,1791.38 U10.8 ; U10.13 4473.37,1825.63
  Top Layer w20: RG2.1 3520,1985 v1(3570,1985) ; C8.2 3520,1507.64 U5.6 ; v1(3534,1343) 3534,1516.76 ; RG5.1 3658.49,3088.49 3768,3198 3803,3198 3933,3328 3979.11,3328 4156.2,3490 C9.2 4193.31,3503.31 U6.6 ; RG1.1 v1(4220,3038) 4220,3010 4173,2963 4173,2316 4175,2314 ; C28.2 4300,1725 4327.27,1697.73 4384,1697.73 4470,1783.73 4470,1829 C26.2 ; U9.11 4302.99,2337.99 4279,2314 C23.2 4175,2314 ; U9.1 4437.99,2337.99 C25.2 4488.14,2291.86 4488.14,2200.14 4430.06,2142.06 4242.06,2142.06 4175,2075 ; 4473.37,1825.63 4484,1815 R4.2 4576,1815 4585,1806 4585,1418 v1(4598,1405) ; v1(4655,1384) 4668,1371 4704,1371 4747,1328 RT1.5 ; P2.2 4741.81,1371.85 4741.81,1317.19 RT1.5 ; HDR1.6 4958,1662 ; C6.2 5120,1372 5135,1387 C7.2 ; v1(5140,1485) 5135,1480 C7.2 ; RG3.1 5035,1990 5024,2001 4971,2001 4958,1988 4958,1662 ; U5.6 3534,1520.94 3534,1516.76 ; U5.6 3565.75,1580 U5.2 3534,1516.76 ; 4175,2075 4175,2314 ; 4175,2075 4175,1805 4315,1665 4510,1665 4575,1600 v1(4575,1384) 4624,1335 C17.2 4713,1312 RT1.5 ; 4958,1662 4958,1633.94 5071,1520.94 U4.6 5135,1497.64 C7.2
  GND w10: 4523,908 4525,908 4575,958 4575,960 ; v1(4655,1384) 4678,1361 4816,1361 4831,1376 4831,1385 4868,1422 5079,1422 5140,1483 v1(5140,1485)
  GND w20: v1(3534,1343) 3567,1310 3680,1310 3722.24,1267.76 3722.24,1046.76 3817,952 3884,952 3961,875 4075,875 4105,845 4242,845 4305,908 ; RG4.1 4225,930 4247,908 4305,908 ; v1(4575,1384) 4575,960 4523,908 4305,908
  VCC w10: v1(3534,1343) 3534,1530 3476,1588 3476,1881 3570,1975 v1(3570,1985)
  Bottom Layer w20: RG5.1 3670.49,3038 v1(4220,3038) 4292,3110 4630.1,3110 RG6.1 ; v1(4598,1405) P2.2
VCC5V: C10.2 C11.2 C16.1 RG5.3 RG6.3 RT1.1 RT1.3 S2.2 SK1.4 SK2.4 SK3.4 SK4.4 U3.6 U7.2 U7.3 U8.2 U8.3 | length 7926.8
  Top Layer w10: RT1.1@4747,1208 RT1.1 ; RT1.3@4823,1204.23 RT1.3
  Top Layer w20: SK1.4 4439.08,2515 ; 4567,2431.89 4567.26,2431.49 ; C10.2 C10.2@4570,2170 ; C11.2 4640,2900 4650,2890 U3.6 4692,2890 4722,2920 4722,2955 4663,3014 4663,3122 4704,3163 4813,3163 4825,3175 RG6.3 ; C16.1 4725,1160 4725,1186 RT1.1@4747,1208 ; RT1.1 4730,1201 4730,1160 4778.77,1160 RT1.3@4823,1204.23 ; RT1.3 4904.43,1218 S2.2
  Top Layer w29: v1(4355,1235) 4355,1214 SK2.4 C16.1 ; v1(4457,2483) 4439.08,2515 4512,2515 4567,2431.89 ; v1(4567,2528) 4567,2431.89 ; C10.2@4570,2170 4567,2173 4567,2431.89
  GND w10: v1(3783,1794) 3896,1681 4211,1681 v1(4291,1601)
  GND w30: v1(4258,2520) 4420,2520 v1(4457,2483)
  VCC w29: v1(4457,1595) v1(4457,2483) 4457,2560 4542,2645 ; 4545,2645 4545,3145 4666.5,3266.5 4793.5,3266.5 4831.7,3228.3 RG6.3
  Bottom Layer w29: RG5.3 3745.1,3167.1 3772,3194 3824,3194 3925,3295 4807,3295 4831.7,3270.3 RG6.3 ; v1(3783,1794) 3783,1936 3802,1955 U7.3 U7.2 ; v1(4258,2520) 4263,2515 SK3.4 ; v1(4291,1601) 4291,1429 ; v1(4355,1235) 4355,1331 SK4.4 4291,1429 ; v1(4457,1595) 4291,1429 ; v1(4567,2528) 4590,2505 4590,2232.52 4620.52,2202 4928,2202 4975,2155 4975,2081 5036,2020 U8.2 U8.3
pads on no net: M1.0 M2.0 RG4.2 RG5.4 RG6.4 S1.0 S2.0 S2.3 SK4.1 U9.8 U10.2 U10.3 U10.4 U10.5 U10.6 U10.7 U10.14 U10.15 U10.16 U10.17 U10.19 U10.21 U10.22 USB1.2 USB1.3 USB1.4

## Polygon pours and split planes (outlines as drawn)
GND on Bottom Layer "Top Layer-No Net" (solid, remove dead copper, pour order 0): 3455,3565 3450,3560 3450,795 5245,795 5245,3570 3455,3570
GND on Top Layer "Top Layer-No Net" (solid, remove dead copper, pour order 4): 3455,3565 3450,3560 3450,795 5245,795 5245,3570 3455,3570

## Keep-outs
Keep-Out Layer:
  lines w10: 3450,1590 3450,2650 3655,2650 3655,2705 3500,2705 cw(c4350,2705) 5200,2705 5050,2705 5050,2655 5250,2655 5250,1590 ; 3450,2240 4075,2240 4075,2440 3450,2440 ; 3450.26,1590.33 ccw(c4245.38,1590.33) 4121,805 4250,805 4310,865 4390,865 4450,805 4579.26,805 ccw(c4454.87,1590.34) 5250,1590.33 ; 3795,3350 3970,3350 4150,3530 ; 4525,3535 4710,3350 4905,3350 ; 5250,2240 4620,2240 4620,2440 5250,2440

## Silkscreen, mask and mechanical layers (free items; w line width, h text height)
Top Overlay:
  circle w10: c4345,2890 r200
  text "ZigBug V1.0 / 2017.6" at 3690,2610 h40

## Text inside footprints (layer, text, board x,y; h text height)
M1: Top Overlay "M" at 3980,2330 h30 r90
M2: Top Overlay "M" at 4720,2350 h30 r270